# Altium PCB AS5047.PcbDoc
Units mm, origin at the board's own origin, x right, y up, seen from the top; angles counter-clockwise.
Board outline 40.64 x 40.64 mm, 2 copper layers (Top Layer, Bottom Layer); 9 components, 10 nets, 32 pads, 8 vias.
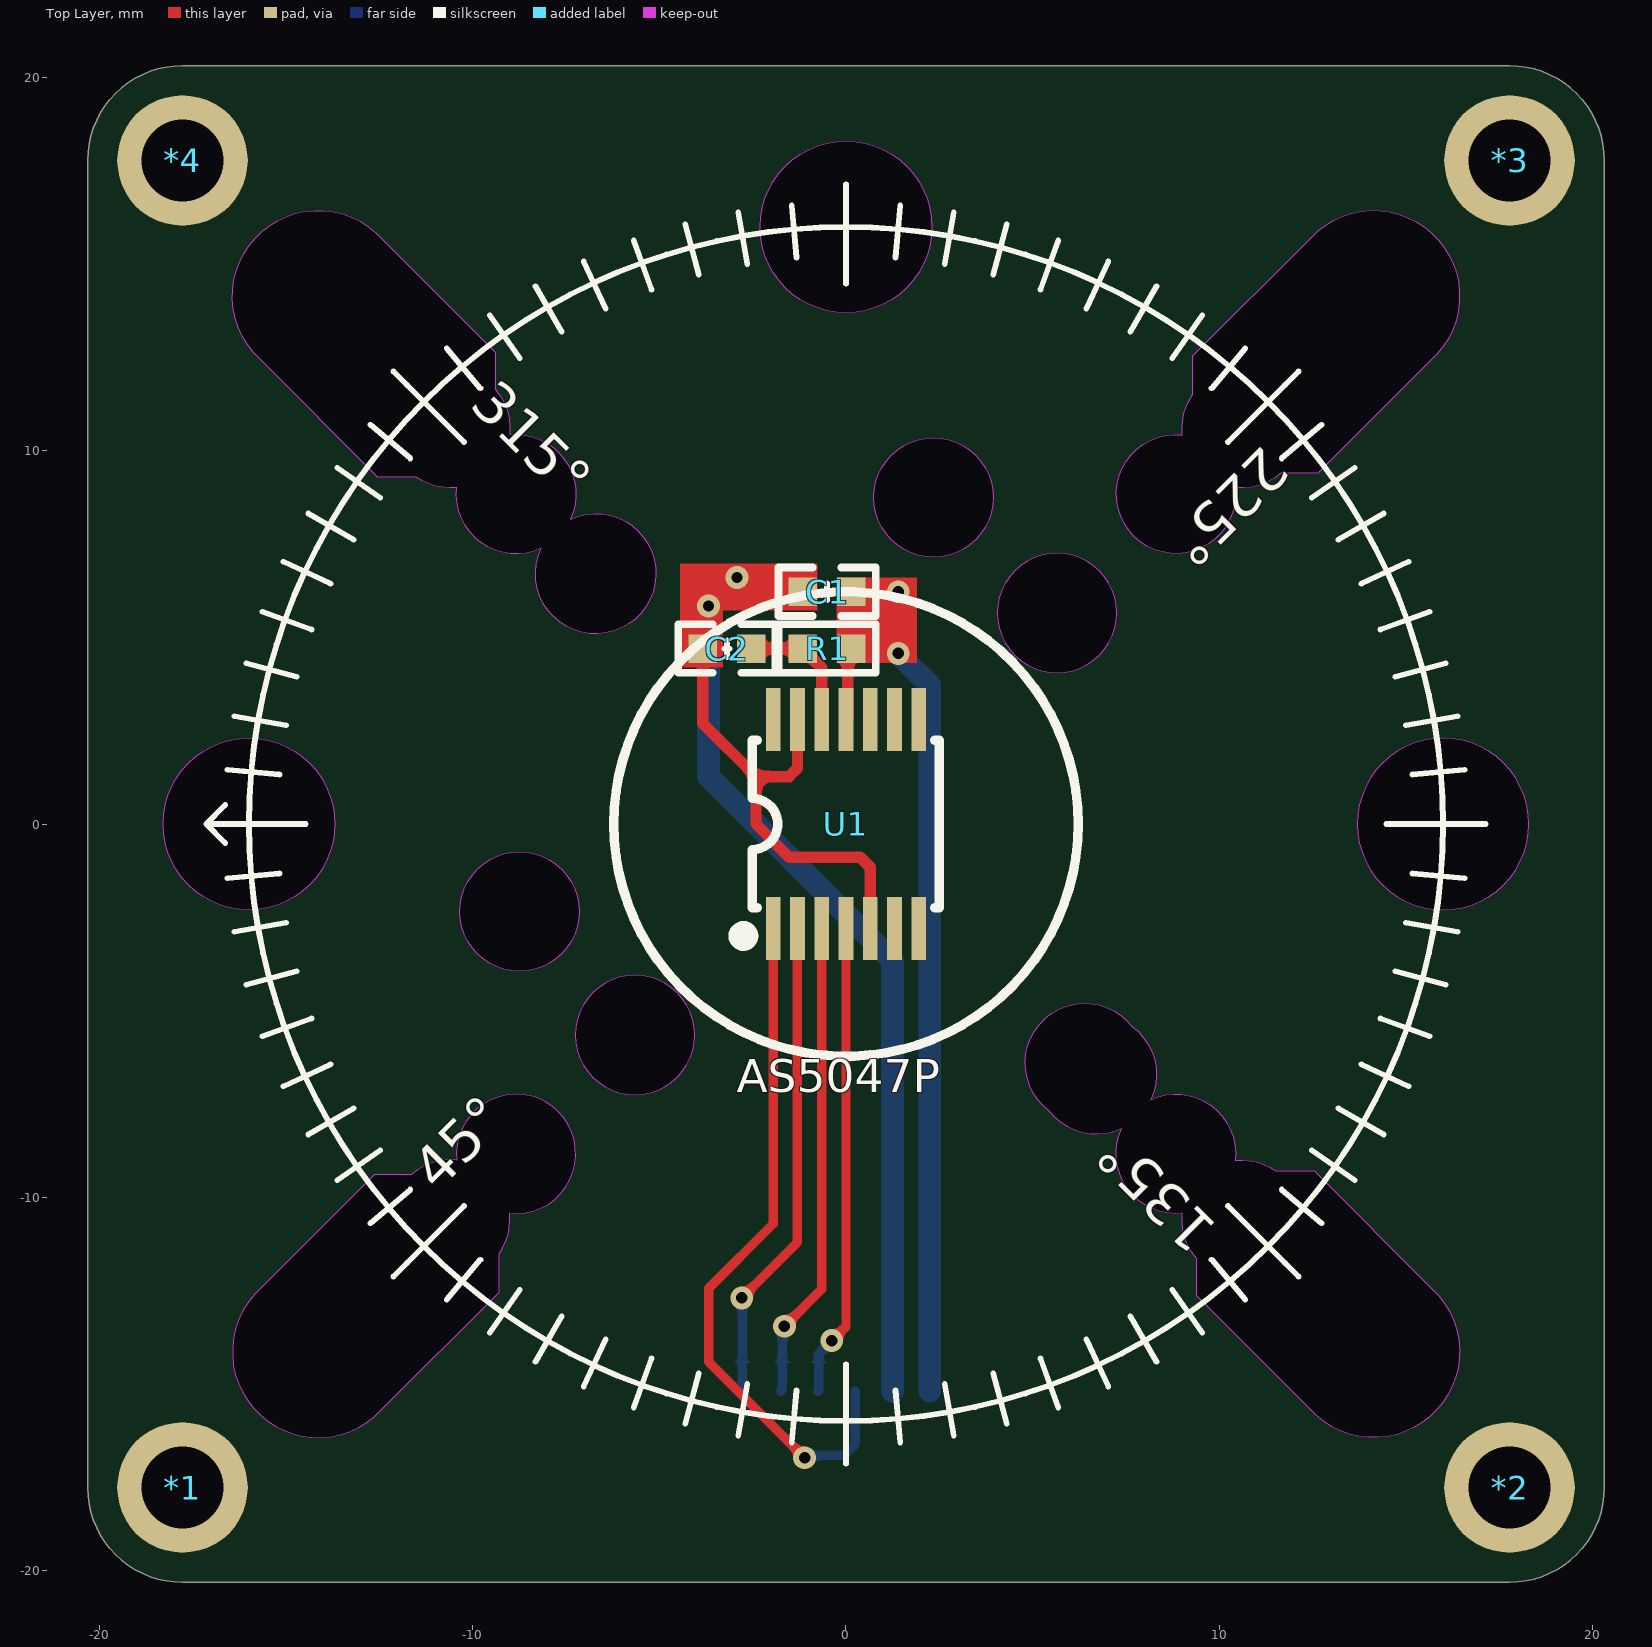
[diagram p0: Top Layer view]
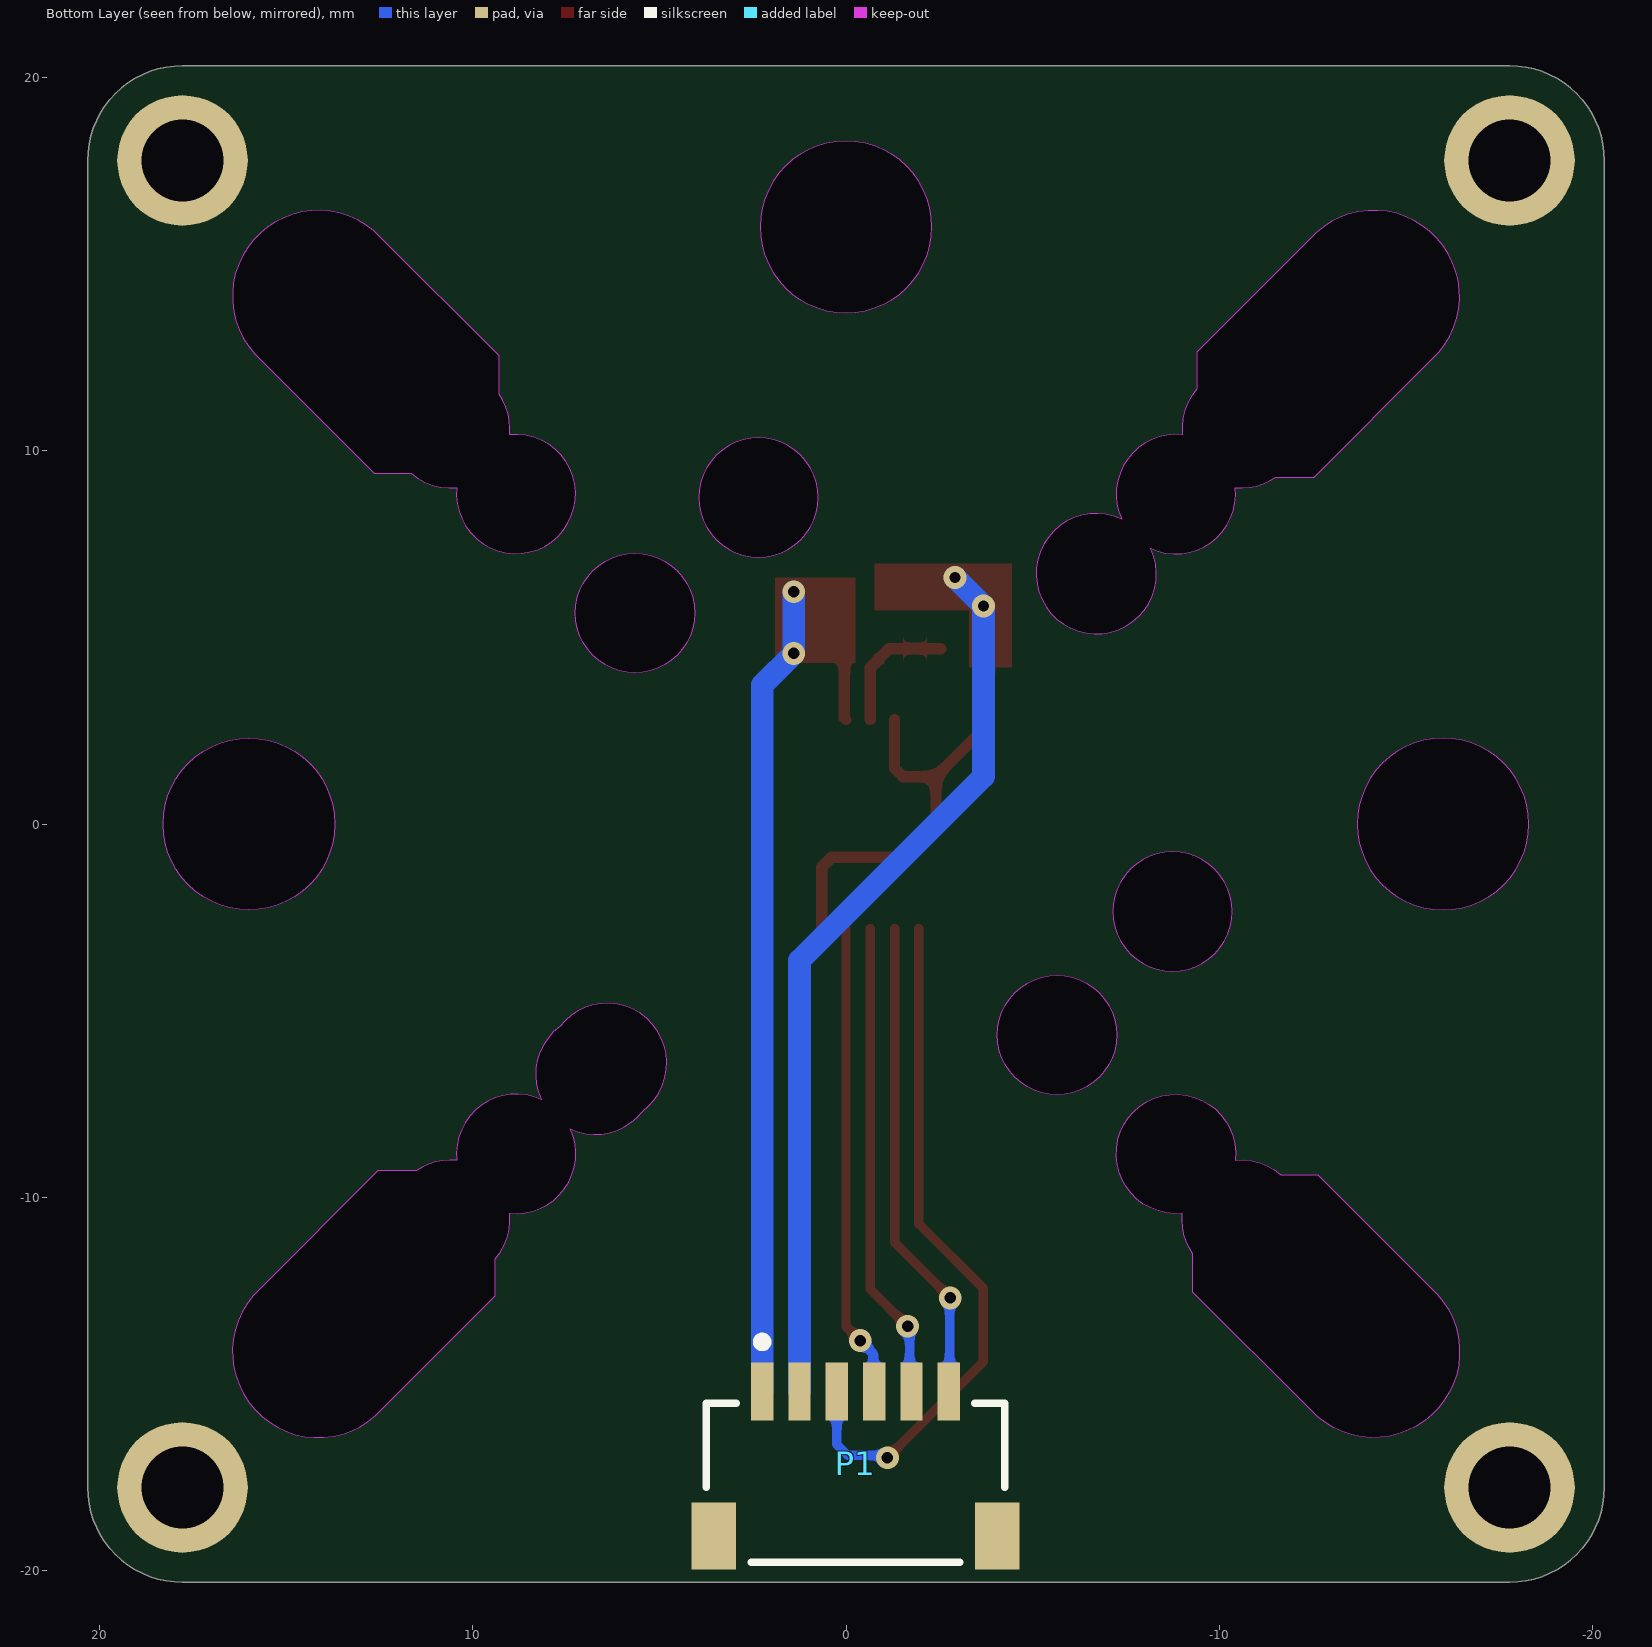
[diagram p1: Bottom Layer view, seen from below]
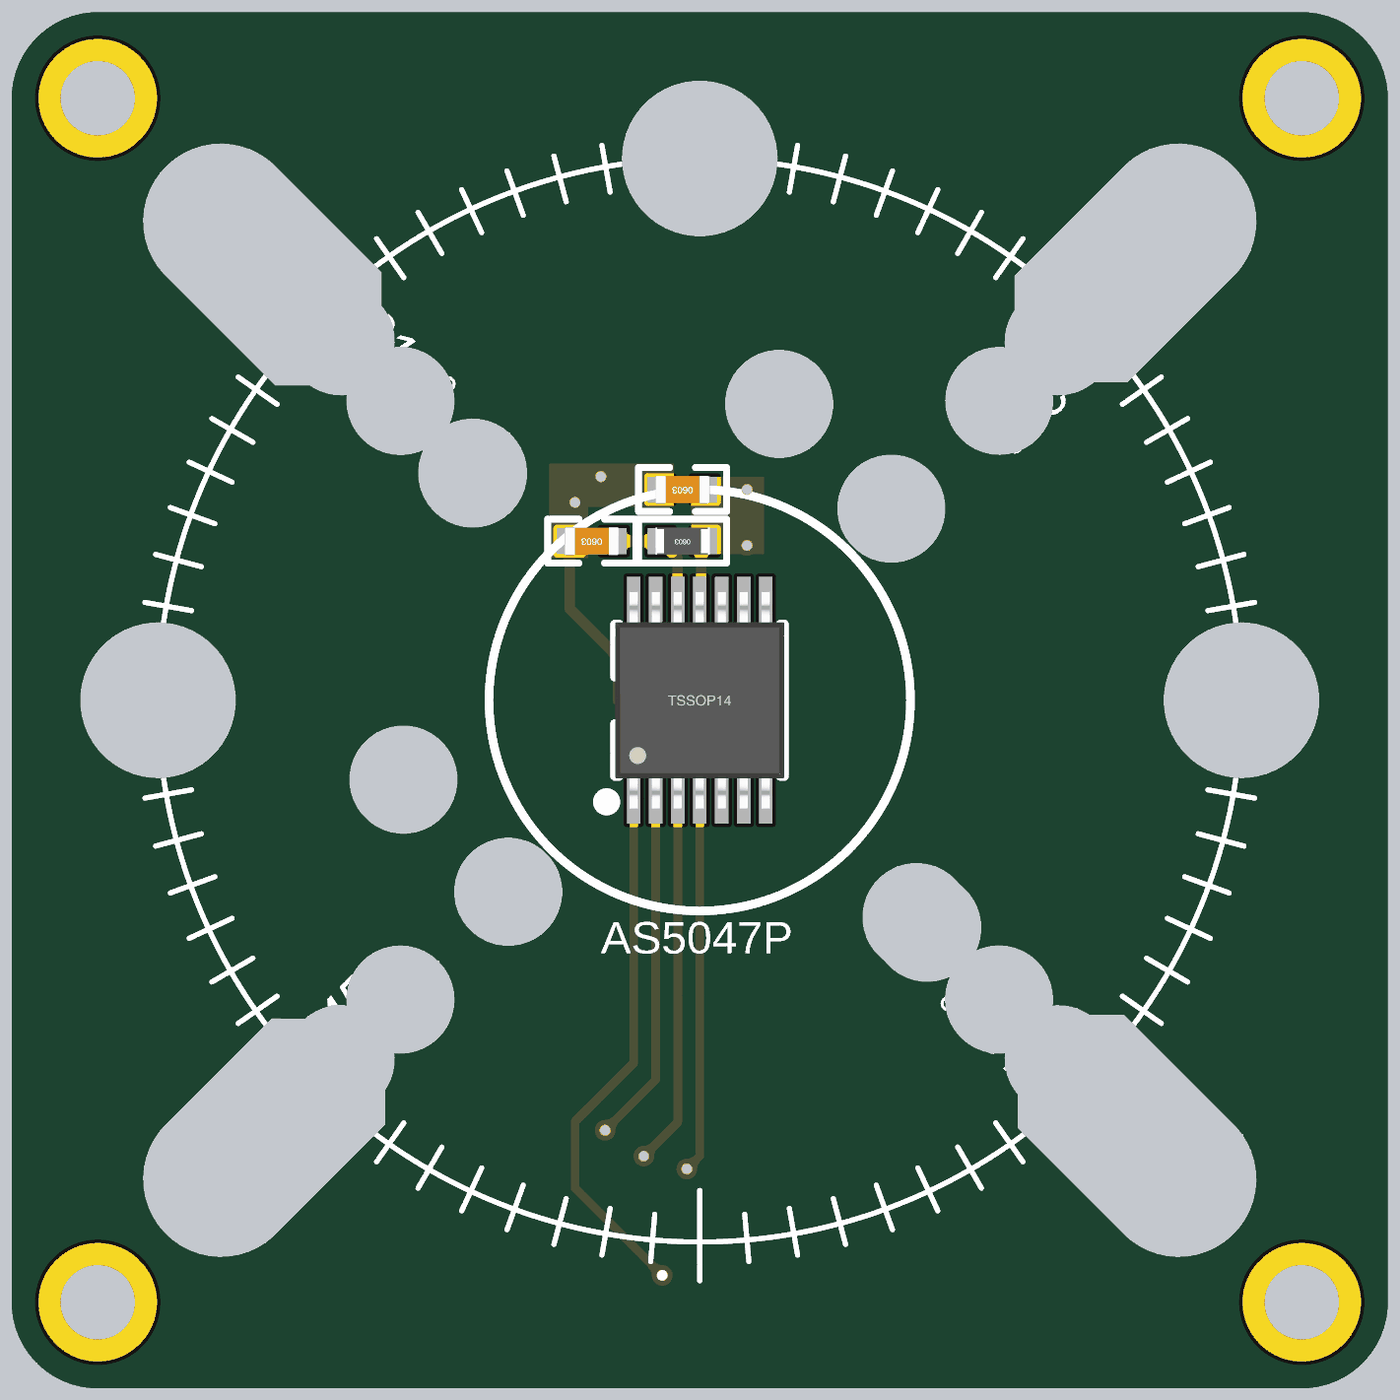
[diagram p2: 3D render of the assembled board from above, using the file's embedded part models]

## Layer stack, top to bottom
Top Solder: solder mask 0.0102, Solder Resist, Dk 3.5
Top Layer: signal copper 0.0356
Dielectric 1: dielectric 0.32, FR-4, Dk 4.8
Bottom Layer: signal copper 0.0356
Bottom Solder: solder mask 0.0102, Solder Resist, Dk 3.5

## Board outline
-20.32,-17.78 -20.32,17.78 cw(c-17.78,17.78) -17.78,20.32 17.78,20.32 cw(c17.78,17.78) 20.32,17.78 20.32,-17.78 cw(c17.78,-17.78) 17.78,-20.32 -17.78,-20.32 cw(c-17.78,-17.78)
cut-out: -7.257,-5.657 ccw(c-5.657,-5.657) -5.657,-7.257 ccw(c-5.657,-5.657) -4.057,-5.657 ccw(c-5.657,-5.657) -5.657,-4.057 ccw(c-5.657,-5.657)
cut-out: -16,-2.3 cw(c-16,0) -18.3,0 cw(c-16,0) -16,2.3 cw(c-16,0) -13.7,0 cw(c-16,0)
cut-out: 13.7,0 ccw(c16,0) 16,-2.3 ccw(c16,0) 18.3,0 ccw(c16,0) 16,2.3 ccw(c16,0)
cut-out: 0,13.7 cw(c0,16) -2.3,16 cw(c0,16) 0,18.3 cw(c0,16) 2.3,16 cw(c0,16)
cut-out: -8.751,-3.945 cw(c-8.751,-2.345) -10.351,-2.345 cw(c-8.751,-2.345) -8.751,-0.745 cw(c-8.751,-2.345) -7.151,-2.345 cw(c-8.751,-2.345)
cut-out: 2.345,7.151 cw(c2.345,8.751) 0.745,8.751 cw(c2.345,8.751) 2.345,10.351 cw(c2.345,8.751) 3.945,8.751 cw(c2.345,8.751)
cut-out: -12.543,9.292 -15.715,12.464 cw(c-14.142,14.142) -12.598,15.847 -9.398,12.647 -9.398,11.656 cw(c-10.606,10.608) -9.016,10.43 cw(c-8.842,8.837) -7.384,8.172 cw(c-6.708,6.708) -8.172,7.384 cw(c-8.839,8.839) -10.429,9.014 cw(c-10.603,10.605) -11.519,9.292
cut-out: -15.847,-12.598 ccw(c-14.142,-14.142) -12.464,-15.715 -9.292,-12.543 -9.292,-11.519 ccw(c-10.606,-10.607) -9.016,-10.429 ccw(c-8.84,-8.84) -10.43,-9.009 ccw(c-10.598,-10.604) -11.656,-9.399 -12.647,-9.398
cut-out: 9.016,-10.43 cw(c8.842,-8.837) 7.384,-8.172 cw(c6.716,-6.725) 5.453,-7.698 cw(c6.404,-6.408) 7.675,-5.431 cw(c6.713,-6.715) 8.172,-7.384 cw(c8.839,-8.839) 10.429,-9.014 cw(c10.603,-10.605) 11.519,-9.292 12.543,-9.292 15.715,-12.464 cw(c14.142,-14.142) 12.598,-15.847 9.398,-12.647 9.398,-11.656 cw(c10.606,-10.608)
cut-out: 9.014,10.429 cw(c10.605,10.603) 9.292,11.519 9.292,12.543 12.464,15.715 cw(c14.142,14.142) 15.847,12.598 12.647,9.398 11.656,9.398 cw(c10.608,10.606) 10.43,9.016 cw(c8.844,8.842)
cut-out: 6.788,6.788 ccw(c5.657,5.657) 4.526,6.788 ccw(c5.657,5.657) 4.526,4.526 ccw(c5.657,5.657) 6.788,4.526 ccw(c5.657,5.657)

## Design rules (kind name [scope] priority, off if disabled: settings)
Clearance [All] p1: gap=0.254 ignorepadtopadclearanceinfootprint=TRUE except(0: Arc-Hole Track-Hole SMDPad-Hole THPad-Hole Via-Hole Fill-Hole Poly-Hole Region-Hole Text-Hole)
PolygonConnect [All] p1: connectstyle=Relief reliefconductorwidth=0.254 reliefentries=4 polygonreliefangle="90 Angle" airgapwidth=0.254
RoutingVias [All] p1: holewidth=0.711 width=1.27 viastyle="Through Hole" minholewidth=0.711 minwidth=1.27 maxholewidth=0.711 maxwidth=1.27
SolderMaskExpansion [All] p1: expansion=0.102 istentingtop=FALSE
Width [All] p1: maxlimit=2.54 minlimit=0.254 preferedwidth=0.254
30 further rules are at their usual default settings.

## Components (designator, comment, footprint, x,y, rotation, side; value= is the part's Value field where it differs from the comment)
*1 "PAD2.0" PAD2.0 -17.78,-17.78 r0 top
*2 "PAD2.0" PAD2.0 17.78,-17.78 r0 top
*3 "PAD2.0" PAD2.0 17.78,17.78 r0 top
*4 "PAD2.0" PAD2.0 -17.78,17.78 r0 top
C1 "0.1uF" "C 0603_L" -0.508,6.223 r180 top
C2 "1uF" "C 0603_L" -3.19,4.699 r180 top
P1 "ENC_SPI" JST-SM06B-SRSS-TB_V -0.254,-17.653 r180 bottom
R1 "0R" "R 0603_L" -0.508,4.699 r180 top
U1 "AS5047U-HTST" TSSOP-14_L5.0-W4.4-P0.65-LS6.4-BL 0,0 r0 top

## Footprints (in the part's own frame and the unit in brackets; to place one, negate y for a bottom-side part, rotate by r counter-clockwise, add the part's x,y. Pads: shape width x height; smd on the part's side, far side on the other; paste and mask are expansions set on the pad)
"C 0603_L" [mil] "无极性贴片电容                                       淘宝ID:黄晶宝石"
  rect 30x30 smd: 1(-25.59,0) 2(25.59,0)
  silkscreen extent -51,-26 51,26, body extent -31,-16 31,16, height 32
JST-SM06B-SRSS-TB_V [mm] "SMD, 6-Leads, Body 8x4.25mm, Pitch 1mm"
  rect 0.6x1.55 smd: 1(-2.5,2.45) 2(-1.5,2.45) 3(-0.5,2.45) 4(0.5,2.45) 5(1.5,2.45) 6(2.5,2.45)
  rect 1.2x1.8 smd: MP1(-3.8,-1.425) MP2(3.8,-1.425)
  silkscreen extent -4,-2.12 4,3.9, body extent -4,-2.12 4,2.82, height 2.9
PAD2.0 [mm]
  round 3.5 hole 2.2: 0(0,0)
"R 0603_L" [mil] "1/10W贴片电阻                 淘宝ID:黄晶宝石"
  rect 30x30 smd: 1(-25.59,0) 2(25.59,0)
  silkscreen extent -51,-26 51,26, body extent -31,-16 31,16, height 16
TSSOP-14_L5.0-W4.4-P0.65-LS6.4-BL [mm]
  rect 0.4x1.7 smd: 1(-1.95,-2.8) 2(-1.3,-2.8) 3(-0.65,-2.8) 4(0,-2.8) 5(0.65,-2.8) 6(1.3,-2.8) 7(1.95,-2.8) 8(1.95,2.8) 9(1.3,2.8) 10(0.65,2.8) 11(0,2.8) 12(-0.65,2.8) 13(-1.3,2.8) 14(-1.95,2.8)
  silkscreen extent -2.95,-3.2 2.5,2.25, body extent -2.5,-3.2 2.5,3.2, height 1.03

## Part data
C1 C2: library part C, "贴片电容"
P1: library part SM06B-SRSS-TB(LF)(SN), "Male Header, Pitch 1 mm, 1 x 6 Position, Height 2.9 mm, -25 to 85 degC, RoHS, Tape and Reel", Manufacturer=JST, Package Description="Male Header, Pitch 1 mm, 1 X 6 Position, Height 2.9 mm", Datasheet URL=http://www.jst-mfg.com/product/pdf/eng/eSR.pdf, Datasheet Version=05/2016, Manufacturer URL=http://www.jst.com/home2.html, Mounting Technology=SurfaceMount, No of Positions=6, Package Reference=SM06B-SRSS-TB(LF)(SN), Pitch=1mm, Style/Orientation=RightAngleHeader/Plug, Termination=Solder, Type=ShroudedHeader
R1: library part R, "贴片电阻"
U1: BOM_Manufacturer=美国AMS, BOM_Manufacturer Part=AS5047U-HTST, BOM_Supplier=LCSC, BOM_Supplier Part=C2153660, Contributor=LCSC, spicePre=U, spiceSymbolName=AS5047U-HTST

## Via types
v1: diameter 0.61, hole 0.305, Top Layer to Bottom Layer, tented both sides, 8 vias

## Nets (pads, with @x,y where several pads share a name; then routed paths per layer and width w, separated by ;. In a path a pad name is that pad's centre, name@x,y a point inside that pad or via, vN(x,y) a via of type N, cw(c..) or ccw(c..) an arc to the next point about the centre after c; other vN are vias at no path point)
CLK: P1.6 U1.2 | length 13.1
  Top Layer w0.254: v1(-2.794,-12.7) -1.3,-11.206 U1.2
  Bottom Layer w0.254: v1@-2.832,-12.738 v1(-2.794,-12.7) -2.774,-12.72 -2.774,-15.183 P1.6
CS: P1.3 U1.1 | length 18.9
  Top Layer w0.254: U1.1 -1.95,-10.713 -3.683,-12.446 -3.683,-14.41 v1(-1.109,-16.984)
  Bottom Layer w0.254: v1(-1.109,-16.984) -1.041,-16.916 -0.045,-16.916 0.246,-16.625 P1.3
ENC_A: U1.7
ENC_B: U1.6
ENC_I: U1.14
GND: C1.2 C2.2 P1.2 U1.5 U1.13 | length 41.2
  Top Layer w0.305: -2.353,6.223 C1.2 ; -2.349,6.35 -3.429,6.35 -3.84,5.939 C2.2 -3.84,2.697 -2.412,1.269 ; U1.13 U1.13 -1.301,1.493 -1.525,1.269 -2.412,1.269 ; U1.5 0.65,-1.158 0.381,-0.889 -1.524,-0.889 -2.412,-0.001 -2.412,1.269
  Bottom Layer w0.61: v1(-2.921,6.604) v1(-3.683,5.842) -3.683,1.27 1.246,-3.659 P1.2
MISO: P1.5 U1.3 | length 12.9
  Top Layer w0.254: v1(-1.651,-13.462) -0.65,-12.461 U1.3
  Bottom Layer w0.254: P1.5 -1.702,-15.152 -1.702,-13.513 v1(-1.651,-13.462) v1@-1.636,-13.477
MOSI: P1.4 U1.4 | length 12.7
  Top Layer w0.254: v1(-0.381,-13.843) 0,-13.462 U1.4
  Bottom Layer w0.254: P1.4 -0.734,-15.183 -0.734,-14.196 v1(-0.381,-13.843)
VDD: C1.1 P1.1 R1.1 U1.11 | length 25.3
  Top Layer w0.305: U1.11 0.044,2.844 0.044,4.601 R1.1 C1.1
  Bottom Layer w0.61: v1(1.397,6.223) v1(1.397,4.572) 2.246,3.723 P1.1
VDD3V3: C2.1 R1.2 U1.12 | length 3.5
  Top Layer w0.305: C2.1 R1.2 -0.65,4.191 U1.12
pads on no net: *1.0 *2.0 *3.0 *4.0 P1.MP1 P1.MP2 U1.8 U1.9 U1.10

## Other copper
Top Layer:
  rectangle net GND: -4.445,4.191 -3.302,6.985
  rectangle net GND: -3.937,5.715 -0.762,6.985
  rectangle net VDD: -0.254,4.318 1.905,6.604

## Silkscreen, mask and mechanical layers (free items; w line width, h text height)
Top Overlay:
  circle w0.152: c0,0 r16
  circle w0.254: c0,0 r6.223
  lines w0.152: -16.637,-0.508 -17.145,0 ; -16.637,0.508 -17.145,0 ; -16.575,-1.45 -15.182,-1.328 ; -16.575,1.45 -15.182,1.328 ; -16.386,-2.889 -15.008,-2.646 ; -16.386,2.889 -15.008,2.646 ; -16.071,-4.306 -14.721,-3.944 ; -16.071,4.306 -14.721,3.944 ; -15.635,-5.691 -14.321,-5.212 ; -15.635,5.691 -14.321,5.212 ; -15.079,-7.032 -13.812,-6.441 ; -15.079,7.032 -13.812,6.441 ; -14.478,0 -17.145,0 ; -14.409,-8.319 -13.198,-7.62 ; -14.409,8.319 -13.198,7.62 ; -13.629,-9.543 -12.484,-8.741 ; -13.629,9.543 -12.484,8.741 ; -12.746,-10.695 -11.675,-9.796 ; -12.746,10.695 -11.675,9.796 ; -12.123,-12.123 -10.237,-10.237 ; -12.123,12.123 -10.237,10.237 ; -11.765,-11.765 -10.776,-10.776 ; -11.765,11.765 -10.776,10.776 ; -10.695,-12.746 -9.796,-11.675 ; -10.695,12.746 -9.796,11.675 ; -9.543,-13.629 -8.741,-12.484 ; -9.543,13.629 -8.741,12.484 ; -8.319,-14.409 -7.62,-13.198 ; -8.319,14.409 -7.62,13.198 ; -7.032,-15.079 -6.441,-13.812 ; -7.032,15.079 -6.441,13.812 ; -5.691,-15.635 -5.212,-14.321 ; -5.691,15.635 -5.212,14.321 ; -4.306,-16.071 -3.944,-14.721 ; -4.306,16.071 -3.944,14.721 ; -2.889,-16.386 -2.646,-15.008 ; -2.889,16.386 -2.646,15.008 ; -1.45,-16.575 -1.328,-15.182 ; -1.45,16.575 -1.328,15.182 ; 0,-17.145 0,-14.478 ; 0,-16.638 0,-15.24 ; 0,14.478 0,17.145 ; 0,15.24 0,16.638 ; 1.328,-15.182 1.45,-16.575 ; 1.328,15.182 1.45,16.575 ; 2.646,-15.008 2.889,-16.386 ; 2.646,15.008 2.889,16.386 ; 3.944,-14.721 4.306,-16.071 ; 3.944,14.721 4.306,16.071 ; 5.212,-14.321 5.691,-15.635 ; 5.212,14.321 5.691,15.635 ; 6.441,-13.812 7.032,-15.079 ; 6.441,13.812 7.032,15.079 ; 7.62,-13.198 8.319,-14.409 ; 7.62,13.198 8.319,14.409 ; 8.741,-12.484 9.543,-13.629 ; 8.741,12.484 9.543,13.629 ; 9.796,-11.675 10.695,-12.746 ; 9.796,11.675 10.695,12.746 ; 10.237,-10.237 12.123,-12.123 ; 10.237,10.237 12.123,12.123 ; 10.776,-10.776 11.765,-11.765 ; 10.776,10.776 11.765,11.765 ; 11.675,-9.796 12.746,-10.695 ; 11.675,9.796 12.746,10.695 ; 12.484,-8.741 13.629,-9.543 ; 12.484,8.741 13.629,9.543 ; 13.198,-7.62 14.409,-8.319 ; 13.198,7.62 14.409,8.319 ; 13.812,-6.441 15.079,-7.032 ; 13.812,6.441 15.079,7.032 ; 14.321,-5.212 15.635,-5.691 ; 14.321,5.212 15.635,5.691 ; 14.478,0 17.145,0 ; 14.721,-3.944 16.071,-4.306 ; 14.721,3.944 16.071,4.306 ; 15.008,-2.646 16.386,-2.889 ; 15.008,2.646 16.386,2.889 ; 15.182,-1.328 16.575,-1.45 ; 15.182,1.328 16.575,1.45 ; 15.24,0 16.638,0
  text "315°" at -10.371,10.939 h1.91 r315
  text "225°" at 10.912,10.443 h1.91 r225
  text "AS5047P" at -2.922,-7.477 h1.52
  text "45°" at -10.682,-10.146 h1.91 r45
  text "135°" at 10.272,-10.554 h1.91 r135
Mechanical 1:
  circle w0.152: c2.345,8.751 r1.6
  circle w0.152: c-8.751,-2.345 r1.6
  circle w0.152: c0,16 r2.3
  circle w0.152: c-16,0 r2.3
  circle w0.152: c16,0 r2.3
  circle w0.152: c-5.657,-5.657 r1.6
  circle w0.152: c5.657,5.657 r1.6
  lines w0.152: -11.656,-9.399 cw(c-10.606,-10.607) -10.43,-9.016 ; -11.656,-9.398 -12.647,-9.398 -15.847,-12.598 ccw(c-14.142,-14.142) -12.464,-15.715 -9.292,-12.543 -9.292,-11.891 -9.292,-11.519 ccw(c-10.606,-10.607) -9.016,-10.429 ; -10.43,-9.009 cw(c-8.839,-8.839) -9.014,-10.429 ; -10.429,9.014 ccw(c-8.839,8.839) -8.172,7.384 ccw(c-6.717,6.718) -7.393,8.168 ; -10.429,9.016 cw(c-10.607,10.606) -11.519,9.292 -11.891,9.292 -12.543,9.292 -15.715,12.464 cw(c-14.142,14.142) -12.598,15.847 -9.398,12.647 -9.398,11.656 ; -9.399,11.656 cw(c-10.607,10.606) -9.016,10.43 ; -9.009,10.43 cw(c-8.839,8.839) -7.384,8.172 ; 5.453,-7.698 ccw(c6.717,-6.718) 7.393,-8.168 ; 5.457,-7.694 cw(c6.407,-6.406) 7.675,-5.431 ; 7.384,-8.172 ccw(c8.839,-8.839) 9.009,-10.43 ; 7.676,-5.436 cw(c6.717,-6.718) 8.172,-7.384 cw(c8.839,-8.839) 10.429,-9.014 ; 9.014,10.429 ccw(c8.839,8.839) 10.43,9.009 ; 9.016,-10.43 ccw(c10.607,-10.606) 9.399,-11.656 ; 9.016,10.429 cw(c10.606,10.607) 9.292,11.519 9.292,11.891 9.292,12.543 12.464,15.715 cw(c14.142,14.142) 15.847,12.598 12.647,9.398 11.656,9.398 ; 9.398,-11.656 9.398,-12.647 12.598,-15.847 ccw(c14.142,-14.142) 15.715,-12.464 12.543,-9.292 11.891,-9.292 11.519,-9.292 ccw(c10.607,-10.606) 10.429,-9.016 ; 10.43,9.016 ccw(c10.606,10.607) 11.656,9.399 ; -20.32,-17.78 ccw(c-17.78,-17.78) -17.78,-20.32 17.78,-20.32 ccw(c17.78,-17.78) 20.32,-17.78 20.32,17.78 ccw(c17.78,17.78) 17.78,20.32 -17.78,20.32 ccw(c-17.78,17.78) -20.32,17.78 -20.32,-17.78